# Altium PCB PCB1.PcbDoc
Units mil, origin at the board's own origin, x right, y up, seen from the top; angles counter-clockwise.
Board outline 3306.97 x 3267.27 mil, 2 copper layers (Component Side, Bottom Layer), stack 12.8 mil thick; 68 components, 44 nets, 272 pads, 441 vias.
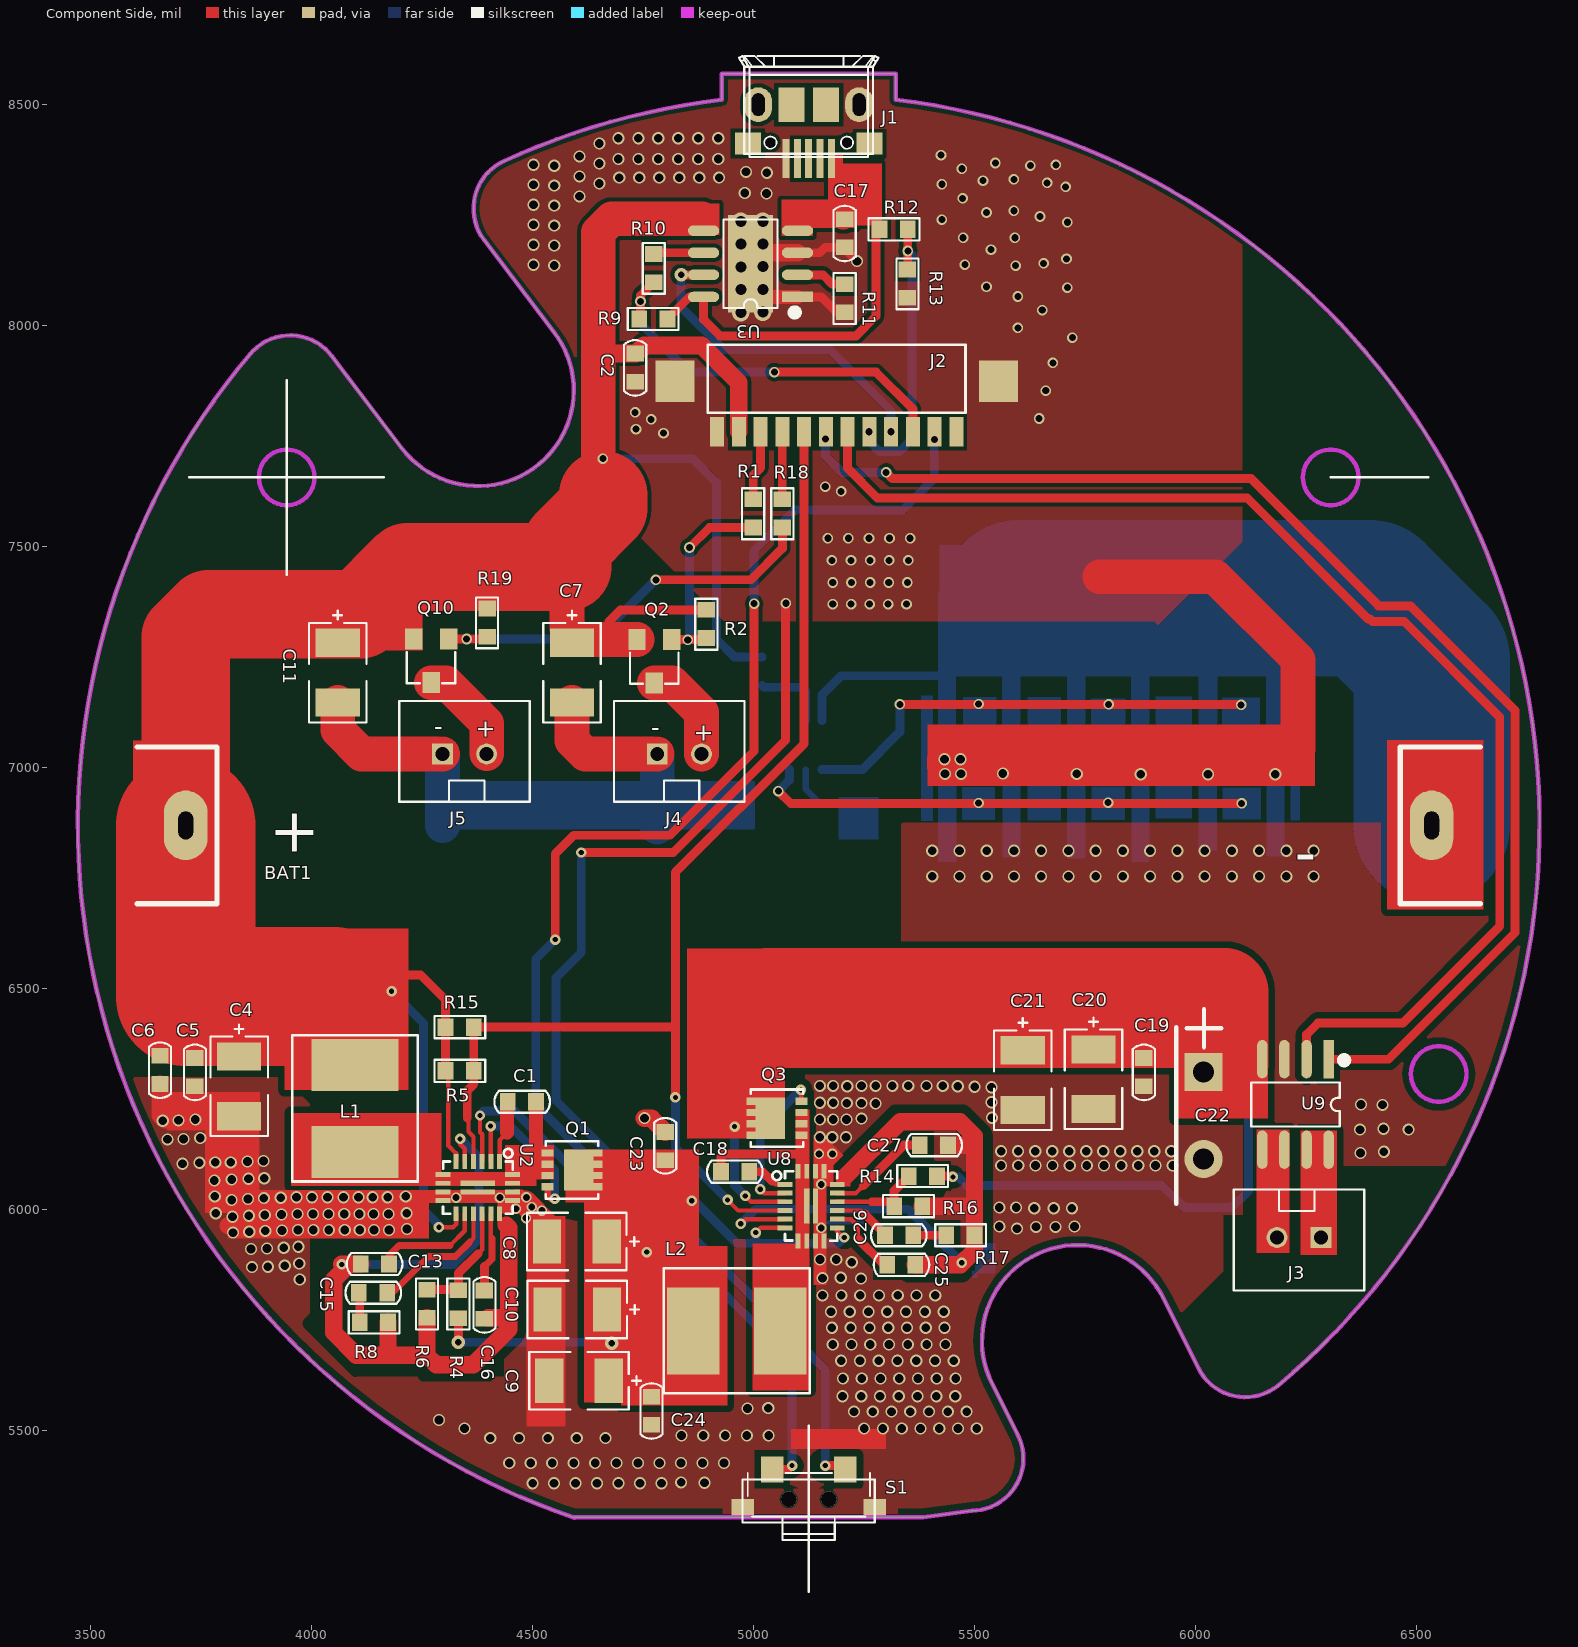
[diagram p0: Component Side view]
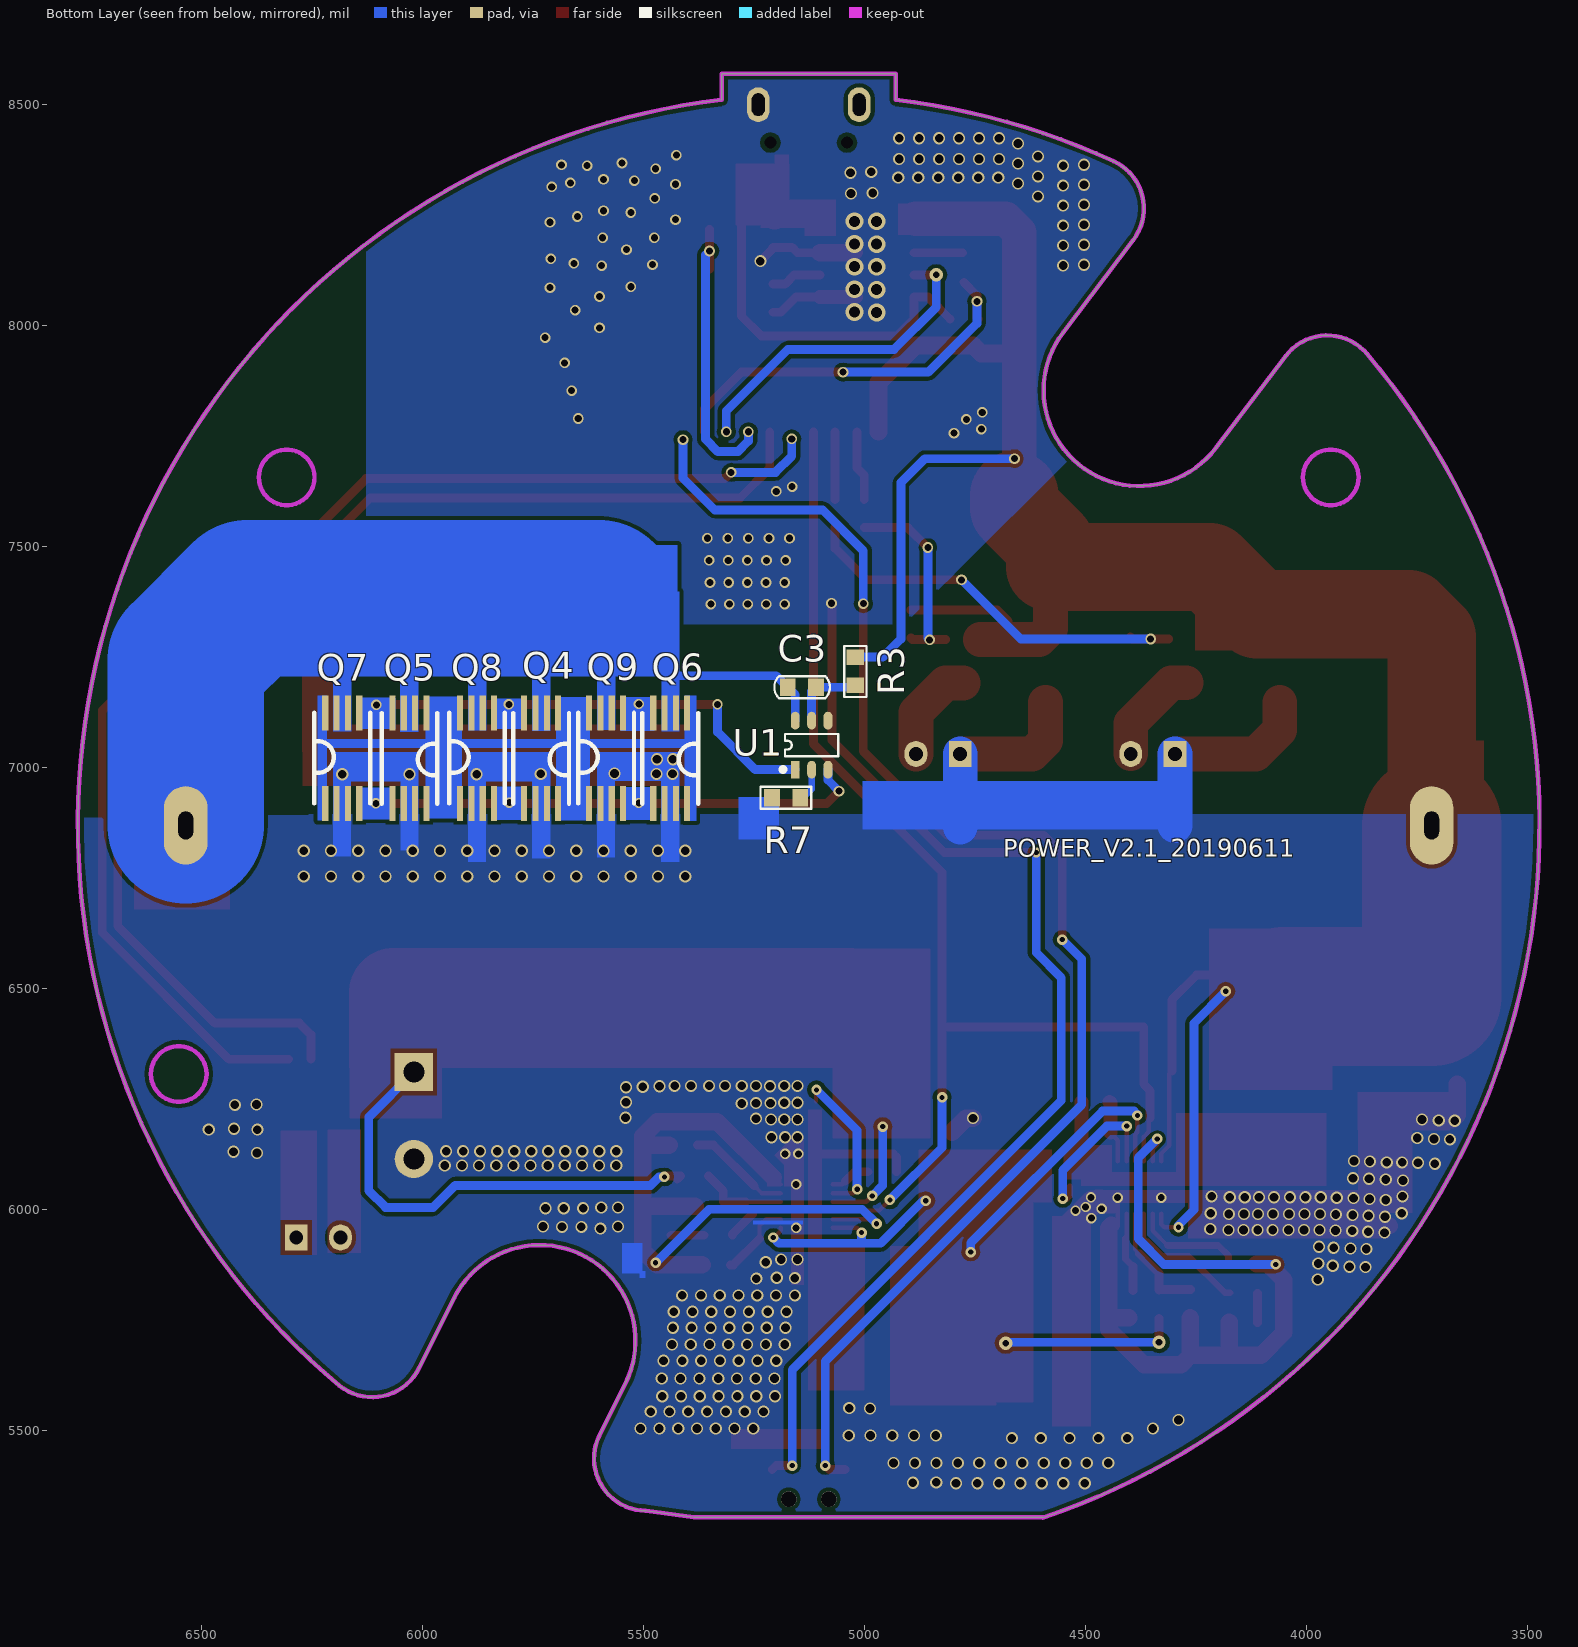
[diagram p1: Bottom Layer view, seen from below]

## Layer stack, top to bottom
Top Solder: solder mask 0.4, Solder Resist, Dk 3.5
Component Side: signal copper 1.4
Dielectric 1: core 10, FR-4, Dk 4.2
Bottom Layer: signal copper 1.4
Solder Side: solder mask 0.4, Solder Resist, Dk 3.5

## Board outline
4205.22,7722.68 4046.52,7931.5 ccw(c3952.49,7860.03) 3862.24,7936.23 3862.25,7936.24 ccw(c5125.65,6869.45) 4596.01,5303.03 4596.26,5303.74 5385.14,5303.74 5494.14,5318.42 5494.96,5318.74 ccw(c5493.31,5436.84) 5598.95,5489.66 5540.52,5606.51 cw(c5734.2,5703.35) 5927.88,5800.19 6007.48,5640.97 ccw(c6113.12,5693.79) 6187.33,5601.9 6187.4,5601.82 ccw(c5125.65,6869.45) 5322.5,8511.24 5322.5,8570.29 4928.8,8570.29 4928.8,8511.24 ccw(c5125.65,6869.45) 4436.1,8372.36 ccw(c4485.35,8265.01) 4391.32,8193.54 4550.01,7984.73 cw(c4377.62,7853.71)

## Design rules (kind name [scope] priority, off if disabled: settings)
Clearance [All] p1: gap=7
ComponentClearance [All] p1 off: gap=10 collisioncheckmode=3 verticalgap=10 showdistances=FALSE
Height [All] p1 off: minheight=0 maxheight=1000 prefheight=500
HoleSize [All] p1: absolutevalues=TRUE maxlimit=1000 minlimit=1 maxpercent=80.000 minpercent=20.000
HoleToHoleClearance [All] p1 off: gap=10 allowstackedmicrovias=TRUE
MinimumSolderMaskSliver [All] p1 off: minsoldermaskwidth=10
NetAntennae [All] p1 off: netantennaetolerance=0
PolygonConnect [All] p1: connectstyle=Direct reliefconductorwidth=10 reliefentries=4 polygonreliefangle="90 Angle" airgapwidth=10
RoutingVias [All] p1: holewidth=28 width=50 viastyle="Through Hole" minholewidth=28 minwidth=50 maxholewidth=28 maxwidth=50
SilkToSilkClearance [All] p1 off: silktosilkclearance=10
SilkToSolderMaskClearance [IsPad] p1 off: minsilkscreentomaskgap=10 clearancetoexposedcopper=TRUE
SolderMaskExpansion [All] p1: expansion=4
Width [All] p1: maxlimit=1000 minlimit=10 preferedwidth=10 minimp=50.000000 maximp=50.000000 favimp=50.000000
22 further rules are at their usual default settings.

## Components (designator, comment, footprint, x,y, rotation, side; value= is the part's Value field where it differs from the comment)
BAT1 "BAT1" BAT18650_DIP2 5125.65,6869.45 r0 top
C1 "0.1uF" C0603 4445,6244 r0 top
C2 "10uF" C0603 4733,7937 r270 top
C3 "0.1uF" C0603 5173,7182 r180 bottom
C4 "220uf/6.3V" C1210-E 3837,6279 r270 top
C5 "10uF" C0603 3737,6343 r270 top
C6 "0.1uF" C0603 3658,6348 r270 top
C7 "220uF/6.3V" C1210-E 4590,7215 r270 top
C8 "22uF/25v" C1210-E 4601,5928 r180 top
C9 "22uF/25v" C1210-E 4606,5613 r180 top
C10 "22uF/25v" C1210-E 4602,5774 r180 top
C11 "220uF/6.3V" C1210-E 4060,7215 r270 top
C13 "2.2uF" C0603 4176,5877 r180 top
C15 "6.8nF" C0603 4108,5812 r0 top
C16 "2.2uF" C0603 4392,5817 r270 top
C17 "10uF" C0603 5207,8241 r270 top
C18 "0.1uF" C0603 4991,6086 r180 top
C19 "0.1uF" C0603 5884,6343 r270 top
C20 "22uF/25v" C1210-E 5770,6295 r270 top
C21 "22uF/25v" C1210-E 5610,6293 r270 top
C22 "22uF/25v" CAP12R5X30 6019,6311.43 r90 top
C23 "10uF" C0603 4801,6112 r90 top
C24 "0.1uF" C0603 4770,5577 r270 top
C25 "C" C0603 5303,5875 r0 top
C26 "6.8nF" C0603 5362,5942 r180 top
C27 "2.2uf" C0603 5377,6146 r0 top
J1 "HEADER_6_2" MICRO_USB_J 5125.65,8500 r180 top
J2 "CON12" CON_12WT 5189,7760 r180 top
J3 "CON2" CON1X2-2LOCK 6285,5937 r180 top
J4 "CON2" CON1X2-2LOCK 4783,7031 r0 top
J5 "CON2" CON1X2-2LOCK 4297,7031 r0 top
L1 "1.5uH/10W" L0630 4099,6229 r270 top
L2 "1.5uH" L0630 4963,5726 r0 top
Q1 "FDMC7678" FDMC7678 4590,6090 r270 top
Q2 "SI2305" SOT23 4816,7290 r180 top
Q3 "FDMC7678" FDMC7678 5054,6207 r90 top
Q4 "8205A" TSSOP8 5731,7123.63 r0 bottom
Q5 "8205A" TSSOP8 6029,7123.63 r0 bottom
Q6 "8205A" TSSOP8 5439,7123.63 r0 bottom
Q7 "8205A" TSSOP8 6181,6918.91 r180 bottom
Q8 "8205A" TSSOP8 5876,6918.91 r180 bottom
Q9 "8205A" TSSOP8 5584,6918.91 r180 bottom
Q10 "SI2305" SOT23 4311,7291 r180 top
R1 "10K" R0603 5000,7607 r270 top
R2 "100K" R0603 4894,7357 r270 top
R3 "100R" R0603 5020,7250 r270 bottom
R4 "240K" R0603 4333,5754 r90 top
R5 "100K" R0603 4304,6314 r0 top
R6 "34K" R0603 4262,5819 r270 top
R7 "1K" R0603 5145,6932 r0 bottom
R8 "21K" R0603 4110,5745 r0 top
R9 "22K" R0603 4806,8015 r180 top
R10 "1K" R0603 4775,8162 r270 top
R11 "1.3K" R0603 5207,8094 r270 top
R12 "47K" R0603 5286,8218 r0 top
R13 "51K" R0603 5349,8127 r270 top
R14 "100K" R0603 5416,6076 r180 top
R15 "100K" R0603 4304,6413 r0 top
R16 "10K" R0603 5319,6008 r0 top
R17 "21K" R0603 5437,5942 r0 top
R18 "10K" R0603 5066,7607 r270 top
R19 "100K" R0603 4398,7360 r270 top
S1 "SW_3X6X5" SW3X6X3R5 5125.65,5345 r0 top
U1 "DW01B" SOT23-6 5119,7051 r180 bottom
U2 "MP3428A" QFN22 4377,6050 r270 top
U3 "TP4056" SOIC8E 4994,8140 r90 top
U8 "MP3428A" QFN22 5131,6008 r0 top
U9 "RZ7889/YX-2530AM" SO8-5R2-1R27 6227,6238 r180 top

## Footprints (in the part's own frame and the unit in brackets; to place one, negate y for a bottom-side part, rotate by r counter-clockwise, add the part's x,y. Pads: shape width x height; smd on the part's side, far side on the other; paste and mask are expansions set on the pad)
BAT18650_DIP2 [mm]
  oval 2.5x4 / inner oval 2x4 / far side oval 2.5x4.5 hole 0.85 slot 1.6 at 90 deg: 1(-35.8,0) 2(35.8,0)
  Component Side region: -38.807,4.85 -33.308,4.85 -33.308,-4.85 -38.807,-4.85 -38.807,4.85
  Component Side region: 33.261,4.9 38.761,4.9 38.761,-4.825 33.261,-4.825 33.261,4.9
  silkscreen extent -38.6,-4.5 38.6,4.5
C0603 [mm]
  rect 0.9x1 smd: 1(0,0) 2(1.62,0)
  silkscreen extent -0.77,-0.64 2.42,0.64
C1210-E [mil]
  rect 64x100 smd: 1(-67.5,0) 2(67.5,0)
  silkscreen extent -140,-65 113,65
CAP12R5X30 [mm]
  rect 2.2x2.2 / inner rect 2x2 / far side rect 2.2x2.2 hole 1.2: 1(0,0)
  round 2.2 / inner round 2 / far side round 2.2 hole 1.2: 2(-5,0)
  silkscreen extent -7.58,-1.02 3.61,1.56
CON1X2-2LOCK [mm]
  rect 1.2x1.2 / inner rect 1.2x1.2 / far side rect 1.3x1.5 hole 0.8: 1(0,0)
  round 1.2 / inner round 1.2 / far side oval 1.3x1.5 hole 0.8: 2(2.54,0)
  silkscreen extent -2.48,-2.75 5.02,3.05
CON_12WT [mm]
  rect 0.8x1.7 smd: 1(-6.875,0) 2(-5.625,0) 3(-4.375,0) 4(-3.125,0) 5(-1.875,0) 6(-0.625,0) 7(0.625,0) 8(1.875,0) 9(3.125,0) 10(4.375,0) 11(5.625,0) 12(6.875,0)
  rect 2.25x2.4 smd: 13(9.3,-2.9) 14(-9.3,-2.9)
  silkscreen extent -7.4,-5 7.4,-1.1
FDMC7678 [mm]
  rect 0.42x0.7 smd: 1(-0.975,-1.4) 2(-0.325,-1.4) 3(0.325,-1.4) 4(0.975,-1.4) 5(0.975,1.4) 6(0.325,1.4) 7(-0.325,1.4) 8(-0.975,1.4)
  rect 2.37x1.7 smd: 9(0,0.381)
  silkscreen extent -1.65,-1.5 1.65,1.5
L0630 [mm]
  rect 3x5 smd: 1(-2.5,0) 2(2.5,0)
  silkscreen extent -4.2,-3.6 4.2,3.6
MICRO_USB_J [mm]
  rect 0.4x2.25 smd: 1(-1.3,3.1) 2(-0.65,3.1) 3(0,3.1) 4(0.65,3.1) 5(1.3,3.1)
  oval 1.6x2 / inner oval 1.3x1.6 / far side oval 1.3x2 hole 0.75 slot 1.3 at 90 deg: 6(-2.9,0) 7(2.9,0)
  rect 1.5x2 smd: 8(-1,0) 9(1,0)
  rect 1.5x1.25 smd: 10(-3.5,2.225) 11(3.5,2.225)
  round 0.6 hole 0.7: 12(2.2,2.18) 13(-2.2,2.18)
  silkscreen extent -3.7,-2.8 3.7,3
QFN22 [mm]
  rect 0.85x0.28 smd: 1(-1.5,1.25) 2(-1.5,0.75) 3(-1.5,0.25) 4(-1.5,-0.25) 5(-1.5,-0.75) 6(-1.5,-1.25) 11(1.5,-1.25) 12(1.5,-0.75) 13(1.5,-0.25) 14(1.5,0.25) 15(1.5,0.75) 16(1.5,1.25)
  rect 0.28x0.85 smd: 7(-0.75,-2) 8(-0.25,-2) 9(0.25,-2) 10(0.75,-2) 17(0.75,2) 18(0.25,2) 19(-0.25,2) 20(-0.75,2)
  rect 0.3x2 smd: 21(-0.25,0) 22(0.25,0)
  silkscreen extent -2.22,-2 1.5,2
R0603 [mm]
  rect 0.9x1 smd: 1(0,0) 2(1.62,0)
  silkscreen extent -0.64,-0.64 2.29,0.64
SO8-5R2-1R27 [mil]
  rect 23.62x86.61 smd: 1(-75,-102.36)
  oval 23.62x86.61 smd: 2(-25,-102.36) 3(25,-102.36) 4(75,-102.36) 5(75,102.36) 6(25,102.36) 7(-25,102.36) 8(-75,102.36)
  silkscreen extent -121,-111 100,50
SOIC8E [mm]
  rect 0.6x1.8 smd: 1(-1.905,-2.7)
  oval 0.6x1.8 smd: 2(-0.635,-2.7) 3(0.635,-2.7) 4(1.905,-2.7) 5(1.905,2.7) 6(0.635,2.7) 7(-0.635,2.7) 8(-1.905,2.7)
  rect 5.588x2.6 smd: 9(0,0)
  silkscreen extent -3.08,-2.82 2.54,1.55
SOT23 [mm]
  rect 1x1.2 smd: 1(0,0) 2(2,0) 3(1,2.5)
  silkscreen extent -0.38,0.76 2.41,2.54
SOT23-6 [mil]
  rect 20x40 smd: 1(-37,-55.5)
  oval 20x40 smd: 2(0,-55.5) 3(37,-55.5) 4(37,55.5) 5(0,55.5) 6(-37,55.5)
  silkscreen extent -70,-60 60,25
SW3X6X3R5 [mm]
  rect 1.3x1.5 smd: 1(-2.1,1.7) 2(2.1,1.7)
  rect 1.3x1 smd: 3(3.8,-0.5) 4(-3.8,-0.5)
  round 0.9 hole 0.9 unplated: 5(-1.15,0) 6(1.15,0)
  silkscreen extent -3.5,-2 3.52,1.51
TSSOP8 [mm]
  rect 0.35x2 smd: 1(-0.975,0) 2(-0.325,0) 3(0.325,0) 4(0.975,0) 5(0.975,5.2) 6(0.325,5.2) 7(-0.325,5.2) 8(-0.975,5.2)
  silkscreen extent -1.6,0 1.6,5.21

## Part data
C1 C2 C3 C4 C5 C6 C7 C8 C9 C10 C11 C13 C15 C16 C17 C18 C19 C20 C21 C22 C23 C24 C26 C27: library part C
L1 L2: library part L
Q2 Q10: library part FDN338P
Q4 Q5 Q6 Q7 Q8 Q9: library part 8205A-TSSOP8
R1 R2 R3 R4 R5 R6 R7 R8 R9 R10 R11 R12 R13 R14 R15 R16 R17 R18 R19: library part R
U1: library part DW01V

## Via types
v1: diameter 27.56, hole 19.68, Component Side to Bottom Layer, 312 vias
v2: diameter 24, hole 16, Component Side to Bottom Layer, 74 vias
v3: diameter 23.62, hole 11.81, Component Side to Bottom Layer, 24 vias
v4: diameter 23.62, hole 15.75, Component Side to Bottom Layer, 18 vias
v5: diameter 40, hole 25, Component Side to Bottom Layer, 10 vias
v6: diameter 30, hole 15, Component Side to Bottom Layer, 3 vias

## Nets (pads, with @x,y where several pads share a name; then routed paths per layer and width w, separated by ;. In a path a pad name is that pad's centre, name@x,y a point inside that pad or via, vN(x,y) a via of type N, cw(c..) or ccw(c..) an arc to the next point about the centre after c; other vN are vias at no path point)
BAT-: BAT1.2 C3.1 Q4.2 Q4.3 Q5.2 Q5.3 Q6.2 Q6.3 Q7.6 Q7.7 Q8.6 Q8.7 Q9.6 Q9.7 U1.6 | length 1712.9
  Bottom Layer w20: U1.6 5156,7165 C3.1 5199,7208 5427,7208
  Bottom Layer w354.33: 5601,7383 6395,7383 6535.1,7242.9 BAT1.2
BI: J2.7 U9.1 | length 2880.3
  Component Side w20: v2(5301,7668) 5315,7654 6127,7654 6415,7366 6487,7366 6724,7129 6724,6627 6437.36,6340.36 U9.1
  Bottom Layer w20: v2(5164,7744) 5164,7705 5201,7668 v2(5301,7668)
CHANGE_SEAL_PA11: J2.9 R18.1 | length 153
  Component Side w20: R18.1 J2.9
CHARGE_DET: J2.5 R12.2 R13.1 | length 659.5
  Component Side w20: R13.1@5349.78,8127.78 R12.2
  Bottom Layer w20: v2(5262,7760) 5262,7739 5286,7715 5331,7715 5359,7743 5359,8160 v2(5350,8169)
CHARGE_EMPTY: J2.4 U3.7 | length 743.1
  Component Side w20: v6(4837,8115) U3.7
  Bottom Layer w20: v6(4837,8115) 4837,8042 4933,7946 5173,7946 5312.03,7806.97 v2(5312.03,7760)
CHARGE_LED: J2.3 R9.2 R10.2 | length 894.8
  Component Side w20: R9.2 4745,8017.78 4745,8039 v2(4745,8055) 4745,8068.22 R10.2 ; v2(5048,7895) 5278,7895 5361.24,7811.76 J2.3
  Bottom Layer w20: v2(4745,8055) 4745,8005 4855,7895 v2(5048,7895)
COUT: Q4.5 Q5.5 Q6.5 Q7.4 Q8.4 Q9.4 U1.3 | length 1118.5
  Component Side w20: v2(5057,6947) 5085,6919 v4(6105,6919)
  Bottom Layer w20: v2(5057,6947) 5082,6972 U1.3
  other v4: 5510,6920 5803,6921
D: Q4.1 Q4.8 Q5.1 Q5.8 Q6.1 Q6.8 Q7.1 Q7.8 Q8.1 Q8.8 Q9.1 Q9.8 | length 832
  Bottom Layer w20: 5392,7055 6224,7055
DOUT: Q4.4 Q5.4 Q6.4 Q7.5 Q8.5 Q9.5 U1.1 | length 1046.4
  Component Side w20: v4(5332,7143) v4(5804,7143) v4@6105,7143
  Bottom Layer w20: U1.1 5246.5,6995.5 5332,7081 v4(5332,7143)
  other v4: 6104,7142 5510,7144
ELECTRIC_LIMIT_PA8: J2.10 R1.1 | length 159.9
  Component Side w20: R1.1 5000,7662 5016.76,7678.76 J2.10
FI: J2.6 U9.2 | length 2858.5
  Component Side w20: J2.6 5213.61,7677.39 5281,7610 6118,7610 6392,7336 6395.5,7336 6400.5,7331 6472.5,7331 6689,7114.5 6689,6641.5 6469.5,6422 6278,6422 6252,6396 U9.2
GND: C2.2 C4.2 C5.2 C6.2 C7.2 C8.2 C9.2 C10.2 C11.2 C13.2 C16.2 C17.2 C19.2 C20.2 C21.2 C22.2 C23.2 C24.2 C25.2 C27.2 J1.5 J1.6 J2.12 J2.13 J2.14 J4.1 J5.1 Q4.6 Q4.7 Q5.6 Q5.7 Q6.6 Q6.7 Q7.2 Q7.3 Q8.2 Q8.3 Q9.2 Q9.3 R6.2 R7.2 R8.2 R11.2 R13.2 R16.2 R17.2 S1.2 U2.5 U2.9 U2.10 U2.16 U2.17 U2.18 U2.22 U3.1 U3.3 U3.9 U8.5 U8.9 U8.10 U8.16 U8.17 U8.18 U8.22 U9.3 | length 9248.7
  Component Side w10: v3(4337,6160) 4337,6148 4347.47,6137.53 U2.5 ; U2.16 4426.21,5967.79 4432.47,5961.53 ; v3(4972,5968) 4982.47,5978.47 U8.5@5070.94,5978.47 ; U8.16@5189.06,6057.21 5206.21,6057.21 5206.21,6072.79
  Component Side w19.68: v3(4611,6808) 4819,6808 5073,7062 v2@5073,7371 ; U8.17 U8.17@5160.53,6093.82 ; v3(5163,5421) 5199.26,5421 S1.2
  Component Side w20: U3.1 5154,8065 5188.78,8030.22 R11.2 ; U3.3 5151,8165 5163.22,8177.22 C17.2 5207,8174 v1(5235,8146)
  Component Side w31.5: U3.9@5019,8065 U3.1 ; U3.9@5019,8165 U3.9@5039,8165
  Component Side w39.37: C6.2 3658,6214 v1@3669,6203 ; 3812,5964 3853,5964 ; v3@4069,5877 4087,5877 ; C13.2 4087,5877 ; R8.2 4173.78,5671 ; R6.2 4262,5670 ; C16.2@4401,5755.22 4446.22,5755.22 4446.22,5728.22 ; 4441.26,5965.26 4447.19,5959.33 4447.19,5729.19 4446.22,5728.22 ; 4464,6026 4474,6026 4484,6016 ; 5206.21,6072.79 5332.43,6199 5468,6199 5500.78,6166.22 5500.78,6008 ; C25.2 5469,5875 5500.78,5906.78 R17.2 5500.78,6008 ; R16.2 5500.78,6008 ; C27.2 5480.56,6146 ; 4087,5877 4051,5841 4051,5722 4102,5671 4173.78,5671 ; 4173.78,5671 4261,5671 4262,5670 ; 4262,5670 4283,5649 4367,5649 4446.22,5728.22
  Component Side w40: v1(4754,6207) 4769.78,6207 C23.2 ; U3.9@5039,8165 U3.3
  Component Side w55.12: 4484,6016 C8.2@4533.5,5966.5
  Component Side w78.74: C11.2 4060,7085 4114,7031 J5.1 ; C7.2 4590,7061 4620,7031 J4.1 ; v1(5433,7019) 5433,7003 6194,7003 6233,7042 6233,7244 6045,7432 5785,7432
  Bottom Layer w19.68: v3(4611,6808) 4611,6582 4554,6525 4554,6247 5163,5638 v3(5163,5421)
  Bottom Layer w20: v3(4069,5876) 4322,5876 4380,5934 4380,6117 v3(4337,6160) ; v3(4972,5968) 5005,6001 5351,6001 v3(5472,5880)
  Bottom Layer w78.74: 4297,6869 J5.1 ; 4783,6866 J4.1
  other v1: 4501,5381 4549.6,5381 4598.2,5381 4646.8,5381 4695.4,5381 4744,5381 4792.6,5381 4890,5382 4837,5383 4448,5427 4496.6,5427 4545.2,5427 4593.8,5427 4642.4,5427 4691,5427 4739.6,5427 4788.2,5427 4836.8,5427 4885.4,5427 4934,5427 4405,5483 4470.25,5483 4535.5,5483 4600.75,5483 4666,5483 4838,5489 4887.25,5489 4936.5,5489 4985.75,5489 5035,5489 4347,5505 5251,5505 5293.5,5505 5336,5505 5378.5,5505 5421,5505 5463.5,5505 5506,5505 4289,5524 5228,5543 5270.5,5543 5313,5543 5355.5,5543 5398,5543 5440.5,5543 5483,5543 4987,5550 5034,5551 5202,5578 5244.5,5578 5287,5578 5329.5,5578 5372,5578 5414.5,5578 5457,5578 5203,5618 5245.5,5618 5288,5618 5330.5,5618 5373,5618 5415.5,5618 5458,5618 5199,5658 5241.5,5658 5284,5658 5326.5,5658 5369,5658 5411.5,5658 5454,5658 5180,5695 5222.5,5695 5265,5695 5307.5,5695 5350,5695 5392.5,5695 5435,5695 5178,5733 5220.5,5733 5263,5733 5305.5,5733 5348,5733 5390.5,5733 5433,5733 5176,5769 5218.5,5769 5261,5769 5303.5,5769 5346,5769 5388.5,5769 5431,5769 5157,5806 5199.5,5806 5242,5806 5284.5,5806 5327,5806 5369.5,5806 5412,5806 3974,5842 5244,5844 5157,5845 5198,5846 3866,5870 3902,5871 3940,5873 3973,5878 5223,5881 5151,5887 5188,5887 3864,5911 3900,5912 3938,5914 3971,5916 3823,5948 3860,5950 3896,5952 3934,5953 3970,5954 4005,5954 4040,5954 4076,5954 4110,5954 4142,5954 4176,5954 4217,5956 5597,5957 5640,5961 5684,5961 5557,5962 5727,5962 3822,5984 3859,5986 3895,5988 3933,5989 3969,5990 4004,5990 4039,5990 4075,5990 4109,5990 4141,5990 4175,5990 3784,5992 4216,5992 5636,6003 5680,6003 5721,6003 5557,6005 5595,6005 3820,6022 3857,6024 3893,6026 3931,6027 3967,6028 4002,6028 4037,6028 4073,6028 4107,6028 4139,6028 4173,6028 3782,6030 4214,6030 3781,6066 3820,6068 3858,6070 3894,6071 5561,6100 5599.8,6100 5638.6,6100 5677.4,6100 5716.2,6100 5755,6100 5793.8,6100 5832.6,6100 5871.4,6100 5910.2,6100 5949,6100 3709,6104 3747,6106 3783,6107 3818,6107 3856,6109 3892,6110 6374,6128 6427,6131 5561,6132 5599.5,6132 5638,6132 5676.5,6132 5715,6132 5753.5,6132 5792,6132 5830.5,6132 5869,6132 5907.5,6132 5946,6132 3675,6159 3711,6160 3749,6162 5150.97,6164.01 5179,6164.01 5210,6164 6373,6181 6483,6181 6426,6183 3664,6201 3700,6202 3738,6204 5150.97,6203.98 5180.97,6203.98 5211,6204 5245,6206 5540,6208 6424,6237 6375,6238 5277,6240 5212,6241 5245,6241 5150.97,6241.99 5180.97,6241.99 5539,6243 5539,6277 5501,6278 5213,6279 5463,6279 5150.97,6280 5180.97,6280 5245,6280 5277,6280 5315,6280 5351,6280 5392,6280 5429,6280 5405,6754 5466.64,6754 5528.29,6754 5589.93,6754 5651.57,6754 5713.21,6754 5774.86,6754 5836.5,6754 5898.14,6754 5959.79,6754 6021.43,6754 6083.07,6754 6144.71,6754 6206.36,6754 6268,6754 5405,6812 5466.64,6812 5528.29,6812 5589.93,6812 5651.57,6812 5713.21,6812 5774.86,6812 5836.5,6812 5898.14,6812 5959.79,6812 6021.43,6812 6083.07,6812 6144.71,6812 6206.36,6812 6268,6812 5877,6985 6029,6985 6181,6985 5434,6986 5470,6986 5732,6986 5565,6987 5469,7019 4550,8136 4503,8138 4550,8181.2 4503,8183.2 4550,8226.4 4503,8228.4 4550,8271.6 4503,8273.6 4607,8292.6 5030,8299 4981,8300 4550,8316.8 4503,8318.8 4652,8321.6 4697,8335 4742.2,8335 4787.4,8335 4832.6,8335 4877.8,8335 4923,8335 4607,8337.8 5031,8346 4984,8348 4550,8362 4503,8364 4652,8366.8 4695,8377 4740.2,8377 4785.4,8377 4830.6,8377 4875.8,8377 4921,8377 4607,8383 4652,8412 4695,8424 4740.2,8424 4785.4,8424 4830.6,8424 4875.8,8424 4921,8424
  other v2: 5180,7370 5221.75,7370 5263.5,7370 5305.25,7370 5347,7370 5074,7372 5180,7419 5222.25,7419 5264.5,7419 5306.75,7419 5349,7419 5178,7469 5221.25,7469 5264.5,7469 5307.75,7469 5351,7469 5169,7519 5215.5,7519 5262,7519 5308.5,7519 5355,7519 5199,7625 5163,7636 4797,7757 4735,7766 4769,7788 5647,7790 4733,7804 5662,7853 5678,7916 5722,7973 5599,7995 5654,8035 5599,8066 5711,8086 5528,8088 5594,8136 5479,8138 5657,8141 5709,8151 5538,8172 5475,8199 5592,8199 5711,8234 5427,8240 5649,8247 5528,8256 5590,8260 5474,8288 5707,8314 5427,8320 5665,8323 5520,8328 5590,8331 5472,8355 5627,8362 5685,8364 5548,8368 5425,8386
  other v4: 5154,5958.66 4486,5981 4522,5998 4463,6002 4499,6006 4328,6027 4426.77,6027 4487,6028 5154,6057.36 5149,6126 5179,6126
  other v5: 4972,8030 5022,8031 4972,8081.5 5022,8082.25 4972,8133 5022,8133.5 4972,8184.5 5022,8184.75 4972,8236 5022,8236
NetC1_1: C1.1 U2.1 | length 142.7
  Component Side w10: U2.1 4426.21,6157.21 4443,6174
  Component Side w31.5: 4443,6174 4443,6242 C1.1
NetC1_2: C1.2 L1.2 Q1.1 Q1.2 Q1.3 U2.7 U2.8 U2.19 U2.20 U2.21 | length 118.2
  Component Side w31.5: 4508.78,6125.78 C1.2
NetC3_2: C3.2 R3.2 U1.5 | length 170.5
  Bottom Layer w20: R3.2 5024.22,7182 C3.2 5119,7172.22 U1.5
NetC13_1: C13.1 U2.12 | length 252.3
  Component Side w10: 4314,5919 4347.47,5952.47 U2.12
  Component Side w15: C13.1 4176,5896 4199,5919 4314,5919
NetC15_1: C15.1 R8.1 | length 65
  Component Side w20: R8.1 C15.1@4110,5810
NetC15_2: C15.2 U2.13 | length 302.2
  Component Side w10: 4359,5927 4367.16,5935.16 U2.13
  Component Side w15: C15.2 4184,5812 4266,5894 4326,5894 4359,5927
NetC16_1: C16.1 U2.15 | length 178.5
  Component Side w10: 4406.53,5937.47 U2.15
  Component Side w15: 4392,5871 4409,5888 4409,5935
  Component Side w20: C16.1 4392,5871
NetC18_1: C18.1 U8.1 | length 91.9
  Component Side w10: 5043,6064 5049.79,6057.21 U8.1@5070.94,6057.21
  Component Side w19.68: C18.1 5021,6086 5043,6064
NetC18_2: C18.2 L2.2 Q3.1 Q3.2 Q3.3 U8.7 U8.8 U8.19 U8.20 U8.21 | length 206.8
  Component Side w19.68: C18.2 4927.22,6119.22 4934,6126 5098,6126
NetC25_1: C25.1 U8.12 | length 173.8
  Component Side w10: U8.12@5189.06,5978.47 5221.53,5978.47 5237,5963 5237,5934
  Component Side w20: 5237,5934 5296,5875 C25.1
NetC26_1: C26.1 R17.1 | length 75
  Component Side w20: C26.1 R17.1
NetC26_2: C26.2 U8.13 | length 134.1
  Component Side w10: U8.13@5189.06,5998.16 5244.84,5998.16 5253,5990
  Component Side w20: 5253,5990 5298.22,5944.78 C26.2
NetC27_1: C27.1 U8.15 | length 232.9
  Component Side w10: U8.15@5189.06,6037.53 5232.53,6037.53 5249,6054
  Component Side w20: 5249,6054 5341,6146 C27.1
NetJ3_1: J3.1 U9.7 U9.8
NetJ3_2: J3.2 U9.5 U9.6
NetJ4_2: J4.2 Q2.3 | length 227.9
  Component Side w79: Q2.3 4816.43,7191.57 4883,7125 J4.2
NetJ5_2: J5.2 Q10.3 | length 233.3
  Component Side w78: Q10.3 4305.43,7192.57 4397,7101 J5.2
NetQ1_4: Q1.4 U2.2 | length 369.1
  Component Side w10: U2.2 v3@4406.53,6189
  Component Side w15: Q1.4 4534.88,6031.88 4541.76,6025 v3(4551,6025)
  Bottom Layer w20: v3(4406,6189) 4451,6189 4551,6089 v3(4551,6025)
NetQ2_1: Q2.1 R1.2 R2.2 | length 452.7
  Component Side w20: Q2.1 4890.78,7290 R2.2 ; v2(4856,7498) 4901.22,7543.22 R1.2
  Bottom Layer w20: v2(4852,7289) 4856,7293 v2(4856,7498)
NetQ3_4: Q3.4 U8.2 | length 346.1
  Component Side w10: v3(5016,6046) 5024.47,6037.53 U8.2@5070.94,6037.53 ; Q3.4 v3@5109.12,6269.88
  Bottom Layer w20: v3(5016,6046) 5016,6179 v3(5108,6271)
NetQ10_1: Q10.1 R18.2 R19.2 | length 935.4
  Component Side w20: Q10.1 v2(4351.89,7291) 4392.78,7291 R19.2 ; v2(4780,7425) 4995,7425 5066,7496 R18.2
  Bottom Layer w20: v2(4351.89,7291) 4646,7291 v2(4780,7425)
NetR4_2: R4.2 R6.1 U2.14 | length 265.2
  Component Side w10: 4377.32,5900.32 4386.84,5909.84 U2.14
  Component Side w20: R6.1 R4.2@4331.78,5819 ; R4.2 4333,5856 4377.32,5900.32
NetR7_1: R7.1 U1.2 | length 76.3
  Bottom Layer w15: U1.2 5119,6951 R7.1@5141.5,6928.5
NetR10_1: R10.1 U3.6 | length 109.7
  Component Side w20: R10.1@4778,8165 U3.6
NetR11_1: R11.1 U3.2 | length 115.4
  Component Side w20: U3.2 5158,8115 5179,8094 R11.1
NetR14_2: R14.2 R16.1 U8.14 | length 201.9
  Component Side w10: U8.14@5189.06,6017.84 5269,6017.84
  Component Side w20: 5269,6017.84 5319,6017.84 5319,6042.78 R14.2
SYS_ON/OFF: J2.2 S1.1 | length 3252.3
  Component Side w19.68: v3(4552,6611) 4552,6805 4594,6847 4812,6847 5002,7037 v2@5002,7369 ; S1.1 5078.93,5411.93 v3(5088,5421)
  Bottom Layer w19.68: v3(4552,6611) 4508,6567 4508,6237 5088,5657 v3(5088,5421) ; v2(5002,7371) 5002,7491 5094,7583 5338,7583 5410,7655 v2(5410,7742)
VBAT: BAT1.1 C2.1 C4.1 C5.1 C6.1 C7.1 C11.1 J2.11 L1.1 Q2.2 Q10.2 R2.1 R3.1 R5.1 R15.1 R19.1 U2.6 U2.11 U3.5 | length 6150.7
  Component Side w10: v3(4289,5960) 4321,5960 4327.79,5966.79 U2.11 ; R5.1 4310,6308 4310,6145 4327.79,6127.21 U2.6
  Component Side w20: 4050.78,6482.22 4099.57,6531 4248,6531 4304,6475 R5.1 ; 4674,7290 4674,7331 4700,7357 R2.1
  Component Side w40: 4652.36,7937 C2.1 4735,7937 4753,7955 4884,7955 4967.54,7871.46 J2.11
  Component Side w78.74: v2@4649.36,7699 4649.36,8211.36 4680,8242 4884,8242
  Component Side w79: 4579,7454 4579,7315 4604,7290 4674,7290 Q2.2
  Component Side w200: BAT1.1 3716.2,7295.2 3768,7347 4111,7347 4218,7454 4579,7454 4579,7505 4661,7587 4661,7617
  Component Side w314.96: BAT1.1 3716.2,6482.22 4050.78,6482.22
  Bottom Layer w19.68: v3(4182,6494) 4254,6422 4254,6000 4289,5965 v3(4289,5960)
  Bottom Layer w20: v2(4660,7699) 4863,7699 4917,7645 4917,7291 4958,7250 R3.1
VCC5V: C17.1 J1.1 R9.1 R12.1 U3.4 U3.8 | length 837.5
  Component Side w20: R9.1 4856,8065 U3.8 4887.7,8014.3 4925,7977 5233,7977 5278,8022 5278,8241
  Component Side w66.93: C17.1@5204,8251 5204,8292
VCC8V: C8.1 C9.1 C10.1 C23.1 C24.1 L2.1 Q1.5 Q1.6 Q1.7 Q1.8 Q1.9 R4.1 U2.3 U8.6 U8.11 | length 1547.1
  Component Side w10: v3(4382,6213) 4382,6175.19 4386.84,6170.35 U2.3 ; v3(5006,5948) 5016.79,5958.79 U8.6@5070.94,5958.79 ; U8.11@5189.06,5958.79 5189.06,5951.94 5204,5937 v3(5206,5937)
  Component Side w20: v6(4333,5700) R4.1
  Bottom Layer w20: v6(4333,5700) 4678,5700 v6(4680,5698) ; v3(4382,6213) 4382,6215 4390,6223 4461,6223 4759,5925 v3(4759,5904) ; v3(4861,6020) 4867,6020 4963,5924 5193,5924 v3(5206,5937) ; 5006,5925 v3(5006,5948)
VCC12V: C19.1 C20.1 C21.1 C22.1 Q3.5 Q3.6 Q3.7 Q3.8 Q3.9 R14.1 U8.3 U9.4 | length 2457.2
  Component Side w10: v3(4982,6031) 4995.16,6017.84 U8.3@5070.94,6017.84
  Component Side w20: R14.1@5423,6069 R14.1 v3@5450,6076
  Component Side w200: 5033,6492 6066,6492 6066,6397
  Bottom Layer w20: v3(4958,6188) 4958,6055 v3(4982,6031) ; v3(5452,6074) 5464,6074 5483,6055 5925,6055 5975,6005 6083,6005 6121,6043 6121,6209.43 C22.1
VCC12V_EN: J2.8 R5.2 R15.2 U2.4 U8.4 | length 2816.1
  Component Side w10: 4356,6207 4356,6176 4367.16,6164.84 U2.4 ; v3(4942,6022) 4965.84,5998.16 U8.4@5070.94,5998.16
  Component Side w20: 4353.19,6207 4353.19,6269.19 4367.78,6283.78 R5.2 R15.2 4823,6413 ; v3(4824,6254) 4824,6763 5115.18,7054.18 J2.8
  Bottom Layer w20: v3(4824,6254) 4824,6140 v3(4942,6022)
pads on no net: J1.2 J1.3 J1.4 J1.7 J1.8 J1.9 J1.10 J1.11 J1.12 J1.13 J2.1 S1.3 S1.4 S1.5 S1.6 U1.4

## Polygon pours and split planes (outlines as drawn)
GND on Component Side "Component Side-No Net" (solid, remove dead copper, pour order 32): 5335,6879 5339,6875 6945,6875 6945,6172 6862,6089 6852,6099 6155,6099 6155,6277 6142,6290 6029,6403 5335,6403
GND on Component Side "Component Side-No Net" (solid, remove dead copper, pour order 6): 5119,6126 5118,6127 5118,6404 6066,6404 6106,6364 6108,6362 6108,5988 5607,5988 5582,6013 5557,6038 5117,6038
GND on Component Side "Component Side-No Net" (solid, remove dead copper, pour order 4): 5121.16,5933 5448,5955 5494,5909 5582,5821 5582,5675 5582,5320 5534,5272 5490,5228 4437,5228 4437,5876 4459,5898 4459,6006 4785,5933
GND on Component Side "Component Side-No Net" (solid, remove dead copper, pour order 2): 3588,6299 3938,6299 3975,6262 4040,6197 4040,5851 4377,5851 4588,5640 4591,5637 4591,5311 4591,5229 4568,5206 4542,5180 4082,5180 3923,5180 3806,5297 3583,5520 3486,5520
GND on Component Side "GND_L01_P020" (solid, remove dead copper, pour order 20): 5500.78,6166.22 5507,6160 6064,6160 6064,5861 5945,5742 5643,5440 5643,5334 5637,5334 5563,5260 5548,5245 5351,5245 5351,5768 5316,5803
GND on Component Side "Component Side-No Net" (solid, remove dead copper, pour order 24): 4933,5307 4931,5309 4931,5368 5321,5368 5327,5362 5327,5301
GND on Component Side "Top Solder-No Net" (solid, remove dead copper, pour order 40): 4149,8692 4173,8668 6106,8668 6106,7511 5917,7322 5908,7331 4956,7331 4935,7331 4231,8035
GND on Bottom Layer "Component Side-No Net" (solid, remove dead copper, pour order 26): 6258,6893 6256,6895 3408,6895 3408,5316 3912,4812 4335,5235 7333,5235 7333,6824 7277,6880
GND on Bottom Layer "Component Side-No Net" (solid, remove dead copper, pour order 22): 5337,5921 5327,5931 5327,6047 5712,6047 5714,6049 5772,5991 5772,5242 5366,5242 5351,5257
GND on Bottom Layer "Top Solder-No Net" (solid, remove dead copper, pour order 42): 4137,8706 4180,8663 6127,8663 6127,7546 6075,7494 5905,7324 4923,7324 4910,7324 4267,7967

## Keep-outs
Keep-Out Layer:
  circle w10: c3944.55,7656.85 r62.99
  circle w10: c6306.75,7656.85 r62.99
  circle w10: c6551,6307 r62.99
  lines w10: 4596.01,5303.03 cw(c5125.65,6869.45) 3862.25,7936.24 cw(c3952.49,7860.03) 4046.52,7931.5 4205.22,7722.68 ccw(c4377.62,7853.71) 4550.01,7984.73 4391.32,8193.54 cw(c4485.35,8265.01) 4436.1,8372.36 cw(c5125.65,6869.45) 4928.8,8511.24 4928.8,8570.29 5322.5,8570.29 5322.5,8511.24 cw(c5125.65,6869.45) 6187.4,5601.82 ; 4596.26,5303.74 5385.14,5303.74 5494.14,5318.42 ; 5494.96,5318.74 ccw(c5493.31,5436.84) 5598.95,5489.66 5540.52,5606.51 cw(c5734.2,5703.35) 5927.88,5800.19 6007.48,5640.97 ccw(c6113.12,5693.79) 6187.33,5601.9

## Other copper
Component Side:
  rectangle net GND: 5394,6959 6271,7098
  rectangle net GND: 5140.84,6052 5182,6122
  rectangle net NetJ3_1: 6238,5897 6321,6179
  rectangle net NetJ3_2: 6139,5902 6214,6181
  rectangle net VCC12V: 5955,6206 6165,6334
  rectangle net VCC12V: 4850,6321 6166,6428
  rectangle net VCC12V: 4850,6161 5072,6591
  rectangle net GND: 5136,5829 5166,6169
  rectangle net GND: 5187.06,6052 5220,6072.79
  rectangle net NetC18_2: 4998,5823 5125,5923
  rectangle net VCC5V: 5064,8203 5135,8274
  region net VCC5V: 5064,8285 5064,8221 5235,8221 5235,8285
  region net VBAT: 4846,8276 4846,8205 4924,8205 4924,8276
  rectangle net VCC5V: 5170,8265 5203,8387
  rectangle net VCC5V: 5169,8227 5291,8367
  rectangle net VBAT: 3940,6271 4220,6636
  rectangle net NetC1_2: 4122,6054 4510,6085
  rectangle net NetC1_2: 3954,6054 4295,6219
  rectangle net NetC1_2: 4439,6068 4549,6146
  rectangle net VCC8V: 4575,6016 4877,6136
  rectangle net VCC8V: 4617,5564 4877,6071
  rectangle net GND: 3674,6179 3884,6266
  rectangle net GND: 3760,5992 3883,6216
  rectangle net GND: 3852,6015 4468,6045
  rectangle net GND: 3812,5935 4267,6038
  rectangle net GND: 4487,5509 4575,5986
  rectangle net GND: 4421,5990.94 4469,6026
  rectangle net VCC8V: 4701,5557 4942,5918
  rectangle net NetC18_2: 5096,5607 5127,6227
  rectangle net NetC18_2: 4999,5591 5127,5859
  region net GND: 5177.57,6096.57 5204.44,6123.44 5168.46,6159.41 5141.59,6132.54
  rectangle net GND: 5086,5458 5301,5504
  rectangle net VBAT: 4085,7265 4252,7381
Bottom Layer:
  rectangle net GND: 5193,6838 5284,6934
  rectangle net GND: 6008,6969 6189,7035
  rectangle net GND: 5710,6969 5883,7035
  rectangle net GND: 5418,6970 5599,7035
  rectangle net GND: 6161,6799 6202,7035
  rectangle net GND: 6008,6813 6049,7035
  rectangle net GND: 5856,6786 5897,7035
  rectangle net GND: 5710,6794 5752,7035
  rectangle net GND: 5564,6797 5605,7035
  rectangle net GND: 5418,6786 5460,7035
  rectangle net D: 6216,6880 6237,7163
  rectangle net BAT-: 6160,7082 6202,7222
  rectangle net BAT-: 6008,7081 6050,7221
  rectangle net BAT-: 5855,7084 5897,7224
  rectangle net BAT-: 5710,7083 5752,7223
  rectangle net BAT-: 5563,7085 5605,7225
  rectangle net BAT-: 5422,7206 5611,7504
  rectangle net BAT-: 5418,7082 5459,7399
  rectangle net D: 5380,6879 5407,7163
  rectangle net COUT: 5472,6882 5547,6956
  rectangle net COUT: 5765,6882 5841,6957
  rectangle net D: 5910,6885 5993,7161
  rectangle net COUT: 6062,6883 6149,6955
  rectangle net DOUT: 6061,7087 6147,7159
  rectangle net DOUT: 5764,7088 5842,7157
  rectangle net D: 5621,6881 5697,7160
  rectangle net DOUT: 5475,7083 5551,7160
  rectangle net GND: 5138,5966 5252,5976
  rectangle net GND: 5501.65,5855 5548,5924
  rectangle net GND: 5495.3,5845 5508,5861.08
  rectangle net GND: 4274,6860 5004,6970

## Silkscreen, mask and mechanical layers (free items; w line width, h text height)
Top Overlay:
  lines w5: 3724.07,7656.85 3944.55,7656.85 ; 3944.55,7436.38 3944.55,7656.85 ; 3944.55,7877.33 3944.55,7656.85 ; 4165.02,7656.85 3944.55,7656.85 ; 4973.15,8597.61 4980.47,8601.91 ; 4989.82,8585.99 4975.49,8610.4 4968.17,8606.1 4979.98,8585.99 ; 5009.51,8610.4 5241.79,8610.4 ; 5066.59,5291.89 5066.59,5252.52 5184.7,5252.52 5184.7,5291.89 ; 5125.65,5134.67 5125.65,5511.81 ; 5261.48,8585.99 5275.81,8610.4 5283.13,8606.1 5271.32,8585.99 ; 5270.83,8601.91 5278.15,8597.61 ; 6306.75,7656.85 6527.22,7656.85 ; 4979.98,8585.99 5271.32,8585.99 ; 4979.98,8585.99 4979.98,8389.14 5271.32,8389.14 5271.32,8585.99 ; 4976.04,5291.89 4976.04,5389.14 5275.26,5389.14 5275.26,5291.89 4976.04,5291.89
  text "+" at 4378,7109 h40 r270
  text "+" at 4871,7100 h40 r270
  text "-" at 4279,7075 h40
  text "-" at 4769,7072 h40
Bottom Overlay:
  text "POWER_V2.1_20190611" at 4686,6799 h39.37

## Text inside footprints (layer, text, board x,y; h text height)
BAT1: Top Overlay "+" at 3905,6810 h100; Top Overlay "-" at 6225.65,6759.45 h100